# Altium PCB Display_OLED.PcbDoc
Units mil, origin at the board's own origin, x right, y up, seen from the top; angles counter-clockwise.
Board outline 1082.99 x 1093 mil, 2 copper layers (Top Layer, Bottom Layer); 11 components, 12 nets, 52 pads, 0 vias.
Unrouted connection lines stored in the file: 39.
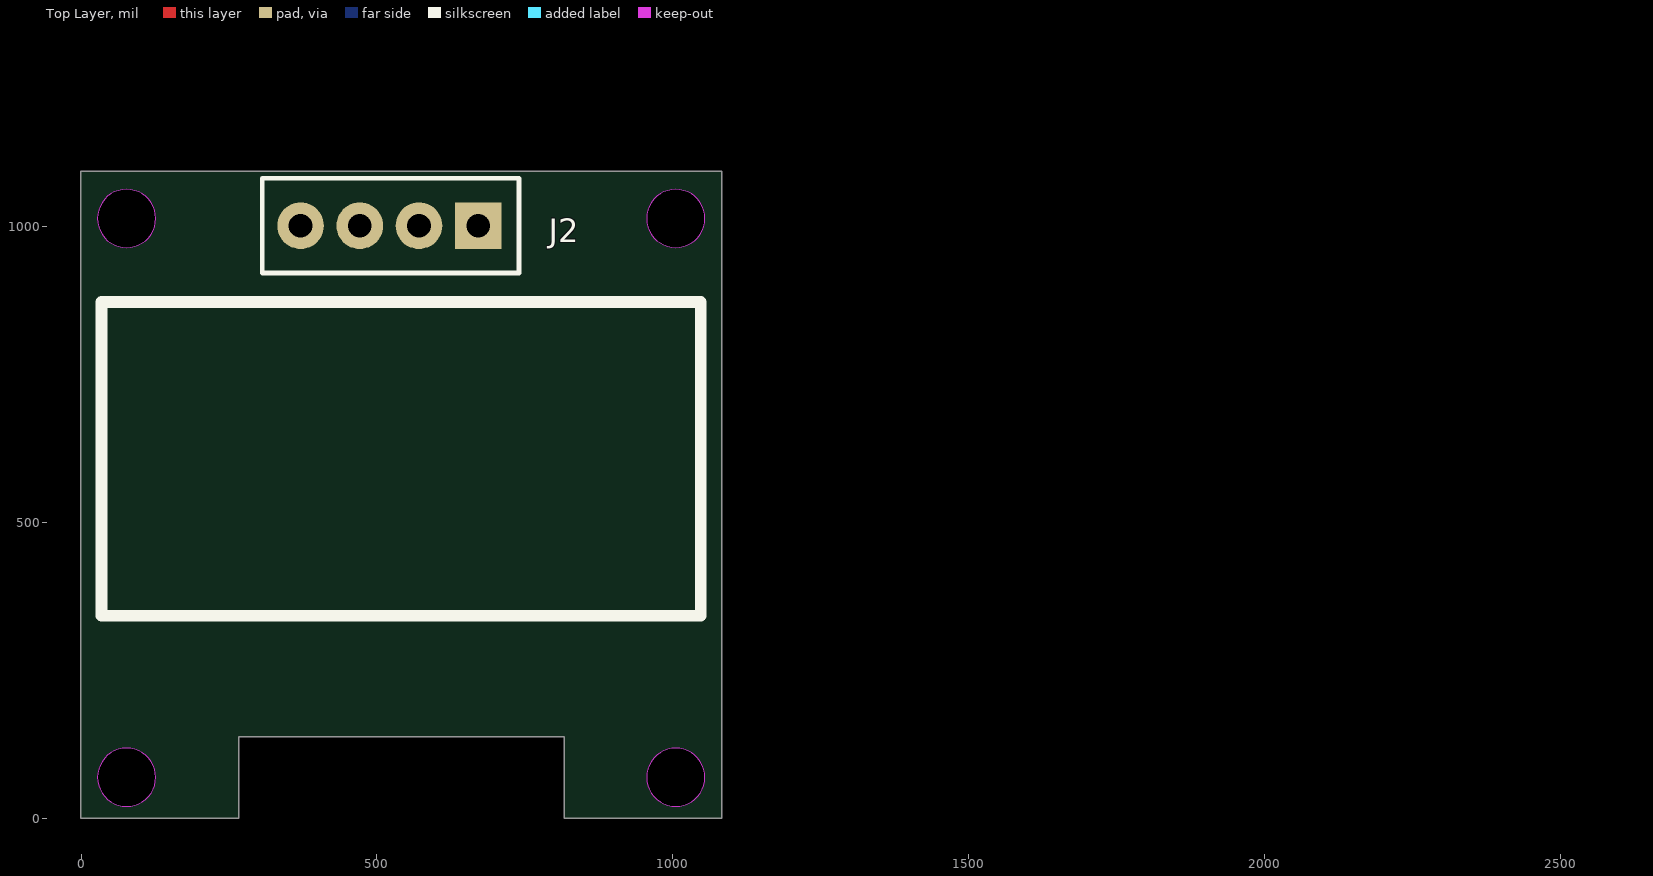
[diagram p0: Top Layer view]
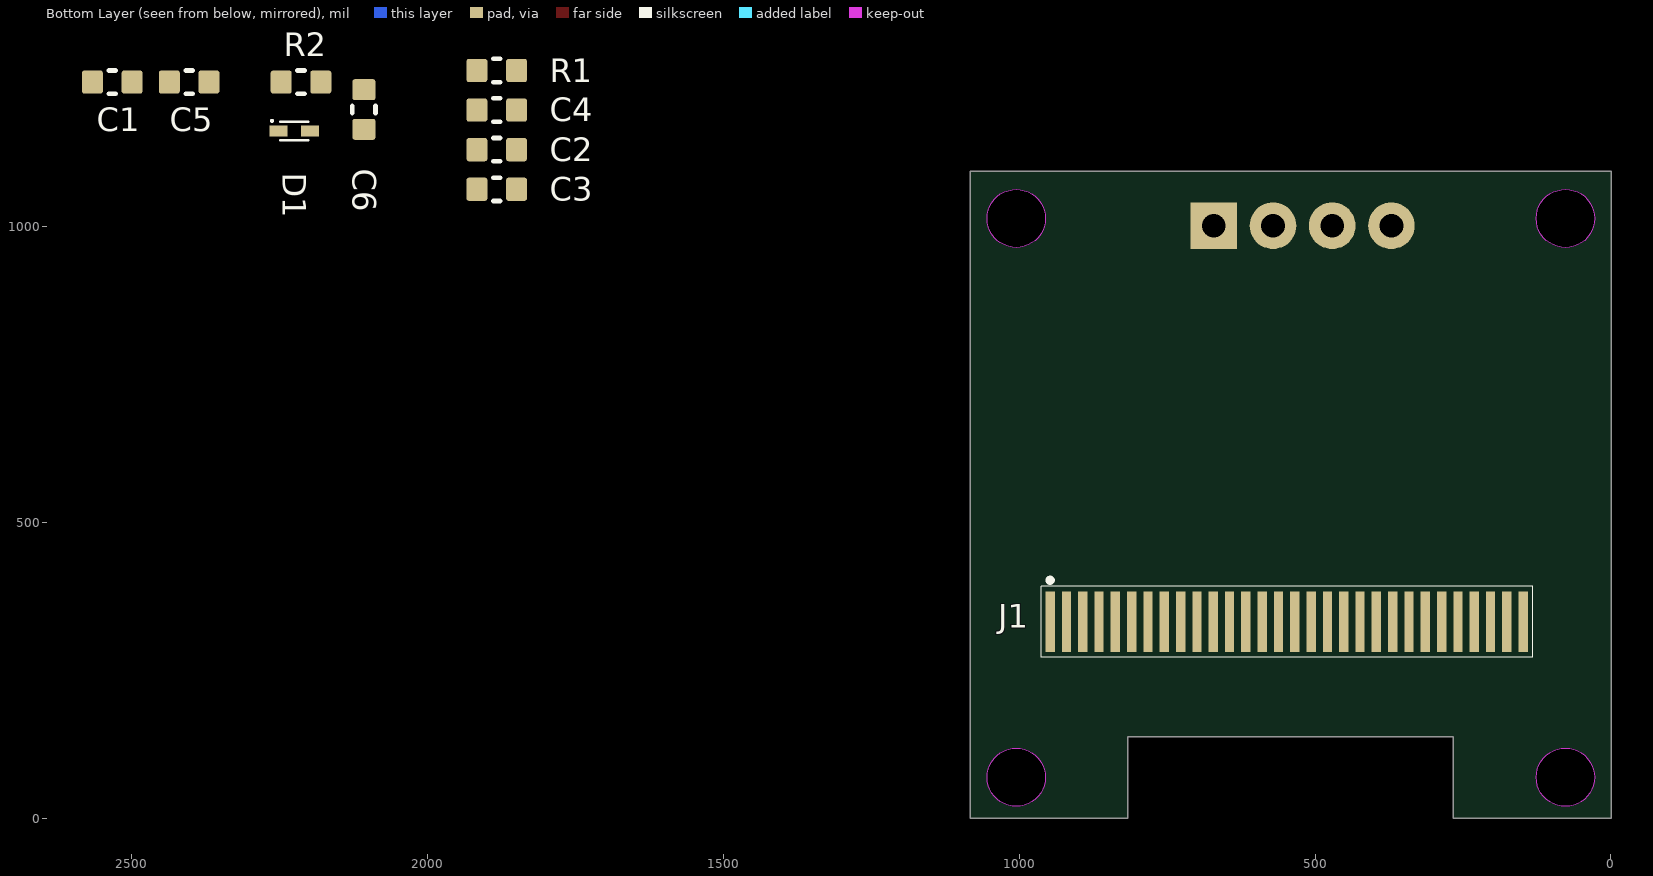
[diagram p1: Bottom Layer view, seen from below]

## Layer stack, top to bottom
Top Solder: solder mask 0.4, Solder Resist, Dk 3.5
Top Layer: signal copper 1.4
Dielectric 1: dielectric 12.6, FR-4, Dk 4.8
Bottom Layer: signal copper 1.4
Bottom Solder: solder mask 0.4, Solder Resist, Dk 3.5

## Board outline
-0.36,-0.21 -0.36,1092.79 1082.63,1092.79 1082.63,-0.21 816.09,-0.21 816.09,137.63 266.13,137.63 266.13,-0.21
cut-out: 955.62,1013.22 ccw(c1004.83,1013.22) 1004.83,964.01 ccw(c1004.83,1013.22) 1054.05,1013.22 ccw(c1004.83,1013.22) 1004.83,1062.43 ccw(c1004.83,1013.22)
cut-out: 27.75,1013.22 ccw(c76.96,1013.22) 76.96,964.01 ccw(c76.96,1013.22) 126.17,1013.22 ccw(c76.96,1013.22) 76.96,1062.43 ccw(c76.96,1013.22)
cut-out: 955.62,69.13 ccw(c1004.83,69.13) 1004.83,19.91 ccw(c1004.83,69.13) 1054.05,69.13 ccw(c1004.83,69.13) 1004.83,118.34 ccw(c1004.83,69.13)
cut-out: 27.75,69.13 ccw(c76.96,69.13) 76.96,19.91 ccw(c76.96,69.13) 126.17,69.13 ccw(c76.96,69.13) 76.96,118.34 ccw(c76.96,69.13)

## Design rules (kind name [scope] priority, off if disabled: settings)
Clearance "Stitching GND" [IsStitchingVia and InNet('GND') vs (IsVia and (Not IsStitchingVia)) Or IsPad] p1: gap=7.87 ignorepadtopadclearanceinfootprint=FALSE
Clearance [All] p2: gap=10 ignorepadtopadclearanceinfootprint=TRUE except(7: Arc-SMDPad Track-SMDPad)
FabricationTestPointUsage [All] p1: valid=0 allowmultiple=TRUE
HoleSize [All] p1: absolutevalues=TRUE maxlimit=157.48 minlimit=1 maxpercent=80.000 minpercent=20.000
MinimumSolderMaskSliver [All] p1: minsoldermaskwidth=5.51
PolygonConnect [All] p1: connectstyle=Direct reliefconductorwidth=10 reliefentries=4 polygonreliefangle="90 Angle" airgapwidth=10
RoutingVias [All] p1: holewidth=11.81 width=23.62 viastyle="Through Hole" minholewidth=7.87 minwidth=15.75 maxholewidth=28 maxwidth=50
SilkToSilkClearance [All] p1: silktosilkclearance=0
SilkToSolderMaskClearance [IsPad] p1: minsilkscreentomaskgap=2.36 clearancetoexposedcopper=TRUE
SolderMaskExpansion [All] p1: expansion=4 istentingtop=FALSE
Width [All] p1: maxlimit=30 minlimit=10 preferedwidth=15 minimp=50.000000 maximp=50.000000 favimp=50.000000
25 further rules are at their usual default settings.

## Components (designator, comment, footprint, x,y, rotation, side; value= is the part's Value field where it differs from the comment)
C1 "1uF" 0603 2532.07,1243.65 r180 bottom value=0.01uF
C2 "0.1uF" 0603 1882.46,1129.47 r180 bottom value=0.01uF
C3 "2uF" 0603 1882.46,1062.54 r180 bottom value=0.01uF
C4 "1uF" 0603 1882.46,1196.4 r180 bottom value=0.01uF
C5 "1uF" 0603 2402.15,1243.65 r180 bottom value=0.01uF
C6 "10uF" 0603 2106.87,1197.39 r90 bottom value=0.01uF
D1 "1N4148WT" SODFL1608X70N 2224.39,1160.97 r180 bottom
J1 "SSD1306" Header30 547.98,332 r180 bottom
J2 "Header4" HDRV4W165P0X396_1X4_1508X1020X1425P 671,1001 r0 top
R1 "390k" 0603 1882.46,1263.33 r0 bottom value=22
R2 "4.7k" 0603 2213.17,1243.65 r180 bottom value=22

## Footprints (in the part's own frame and the unit in brackets; to place one, negate y for a bottom-side part, rotate by r counter-clockwise, add the part's x,y. Pads: shape width x height; smd on the part's side, far side on the other; paste and mask are expansions set on the pad)
0603 [mm] "Resistor 0603 Medium Density"
  rrect25% 0.9x1 smd: 1(-0.85,0) 2(0.85,0)
  silkscreen extent -0.15,-0.5 0.15,0.5, body extent -0.8,-0.4 0.8,0.4, height 0.3
HDRV4W165P0X396_1X4_1508X1020X1425P [mm]
  rect 2x2 hole 1.02: 1(0,0)
  round 2 hole 1.02: 2(-2.54,0) 3(-5.08,0) 4(-7.62,0)
  silkscreen extent -9.27,-2.03 1.75,2.03
Header30 [mm]
  rect 0.4x2.6 smd mask+0.08: 1(-10.15,0) 2(-9.45,0) 3(-8.75,0) 4(-8.05,0) 5(-7.35,0) 6(-6.65,0) 7(-5.95,0) 8(-5.25,0) 9(-4.55,0) 10(-3.85,0) 11(-3.15,0) 12(-2.45,0) 13(-1.75,0) 14(-1.05,0) 15(-0.35,0) 16(0.35,0) 17(1.05,0) 18(1.75,0) 19(2.45,0) 20(3.15,0) 21(3.85,0) 22(4.55,0) 23(5.25,0) 24(5.95,0) 25(6.65,0) 26(7.35,0) 27(8.05,0) 28(8.75,0) 29(9.45,0) 30(10.15,0)
  silkscreen extent -10.53,-1.52 10.55,1.88
SODFL1608X70N [mm]
  rect 0.78x0.47 smd: 1(-0.675,0) 2(0.675,0)
  silkscreen extent -1,-0.4 0.6,0.48, body extent -0.8,-0.4 0.8,0.4, height 0.7

## Part data
C1 C2 C3 C4 C5 C6: library part Cap, "Capacitor", LatestRevisionDate=17-Jul-2002, LatestRevisionNote="Re-released for DXP Platform.", PackageReference=RAD-0.3, Published=8-Jun-2000, Publisher="Altium Limited"
D1: "Diode", Manufacturer_Name=SEMTECH, Datasheet Link=https://datasheet.lcsc.com/szlcsc/Semtech-1N4148WT_C27748.pdf, Height=0.7mm, Manufacturer_Part_Number=1N4148WT
J1: library part Header_SMD_30
J2: "Connector", Arrow Part Number=0009652048, Manufacturer_Name=Molex, Mouser Part Number=N/A, Arrow Price/Stock=https://www.arrow.com/en/products/0009652048/molex, Datasheet Link=https://www.molex.com/pdm_docs/sd/009652048_sd.pdf, Height=14.25mm, Manufacturer_Part_Number=0009652048, Mouser Price/Stock=https://www.mouser.co.uk/ProductDetail/Molex/0009652048?qs=PBcRNPEHKsr%252BMEGD33m%2F9w%3D%3D, Syatem=connector, System=Connector
R1 R2: library part Res, "Resistor", LatestRevisionDate=29-May-2009, LatestRevisionNote="IPC-7351 Footprint Added.", PackageDescription="Chip Resistor", PackageReference=J1-0603, Published=8-Jun-2000, Publisher="Altium Limited"

## Nets (pads, with @x,y where several pads share a name; then routed paths per layer and width w, separated by ;. In a path a pad name is that pad's centre, name@x,y a point inside that pad or via, vN(x,y) a via of type N, cw(c..) or ccw(c..) an arc to the next point about the centre after c; other vN are vias at no path point)
GND: C2.1 C3.1 C4.1 C6.2 J1.1 J1.8 J1.10 J1.12 J1.13 J1.15 J1.16 J1.17 J1.21 J1.22 J1.23 J1.24 J1.25 J1.29 J1.30 J2.1 R1.2
NetC1_1: C1.1 J1.2
NetC1_2: C1.2 J1.3
NetC2_2: C2.2 C3.2 J1.28
NetC4_2: C4.2 J1.27
NetC5_1: C5.1 J1.4
NetC5_2: C5.2 J1.5
NetC6_1: C6.1 D1.2 J1.14 R2.2
NetJ1_26: J1.26 R1.1
SCL: J1.18 J2.2
SDA: J1.19 J1.20 J2.3
VCC: D1.1 J1.6 J1.9 J1.11 J2.4 R2.1
pads on no net: J1.7

## Silkscreen, mask and mechanical layers (free items; w line width, h text height)
Top Overlay:
  lines w20: 34.72,341.96 34.72,871.88 1046.92,871.88 1046.92,341.96 34.72,341.96
Board:
  circle w0.5: c76.96,69.13 r49.21
  circle w0.5: c1004.83,69.13 r49.21
  circle w0.5: c1004.83,1013.22 r49.21
  circle w0.5: c76.96,1013.22 r49.21
  lines w0.5: -0.36,-0.21 266.13,-0.21 266.13,137.63 816.09,137.63 816.09,-0.21 1082.63,-0.21 1082.63,1092.79 -0.36,1092.79 -0.36,-0.21